# EAGLE board DemoPCB1 (EAGLE 5.11)
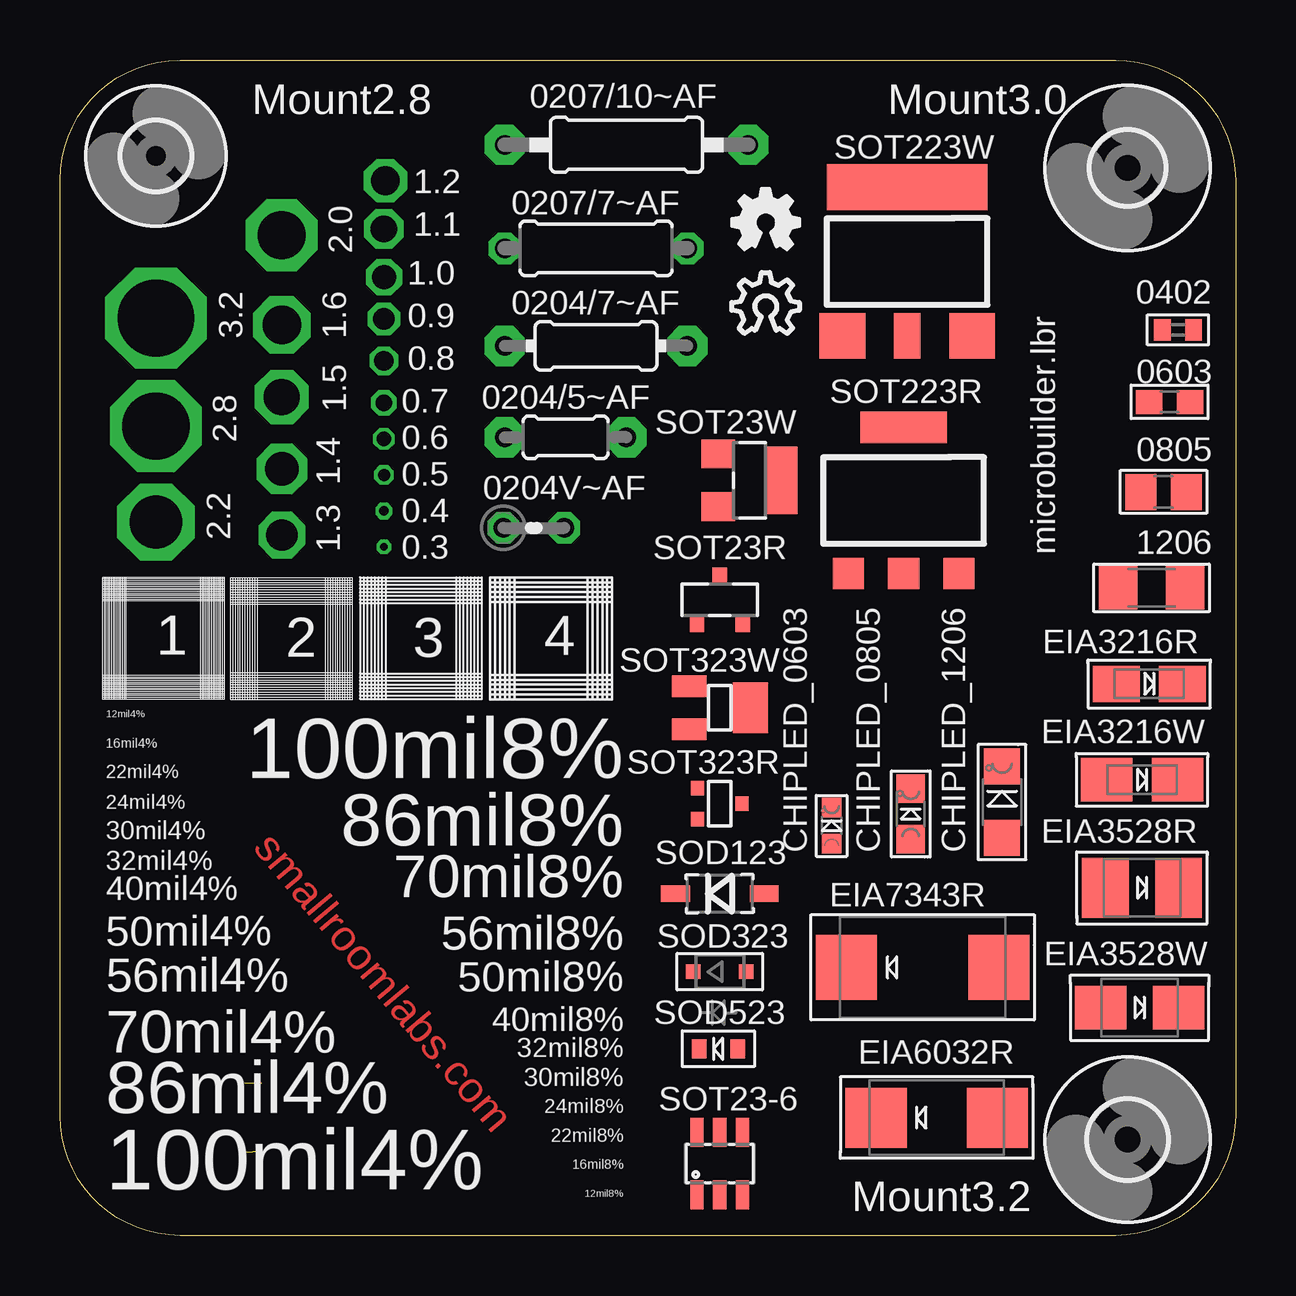
[diagram p0: board, top side]
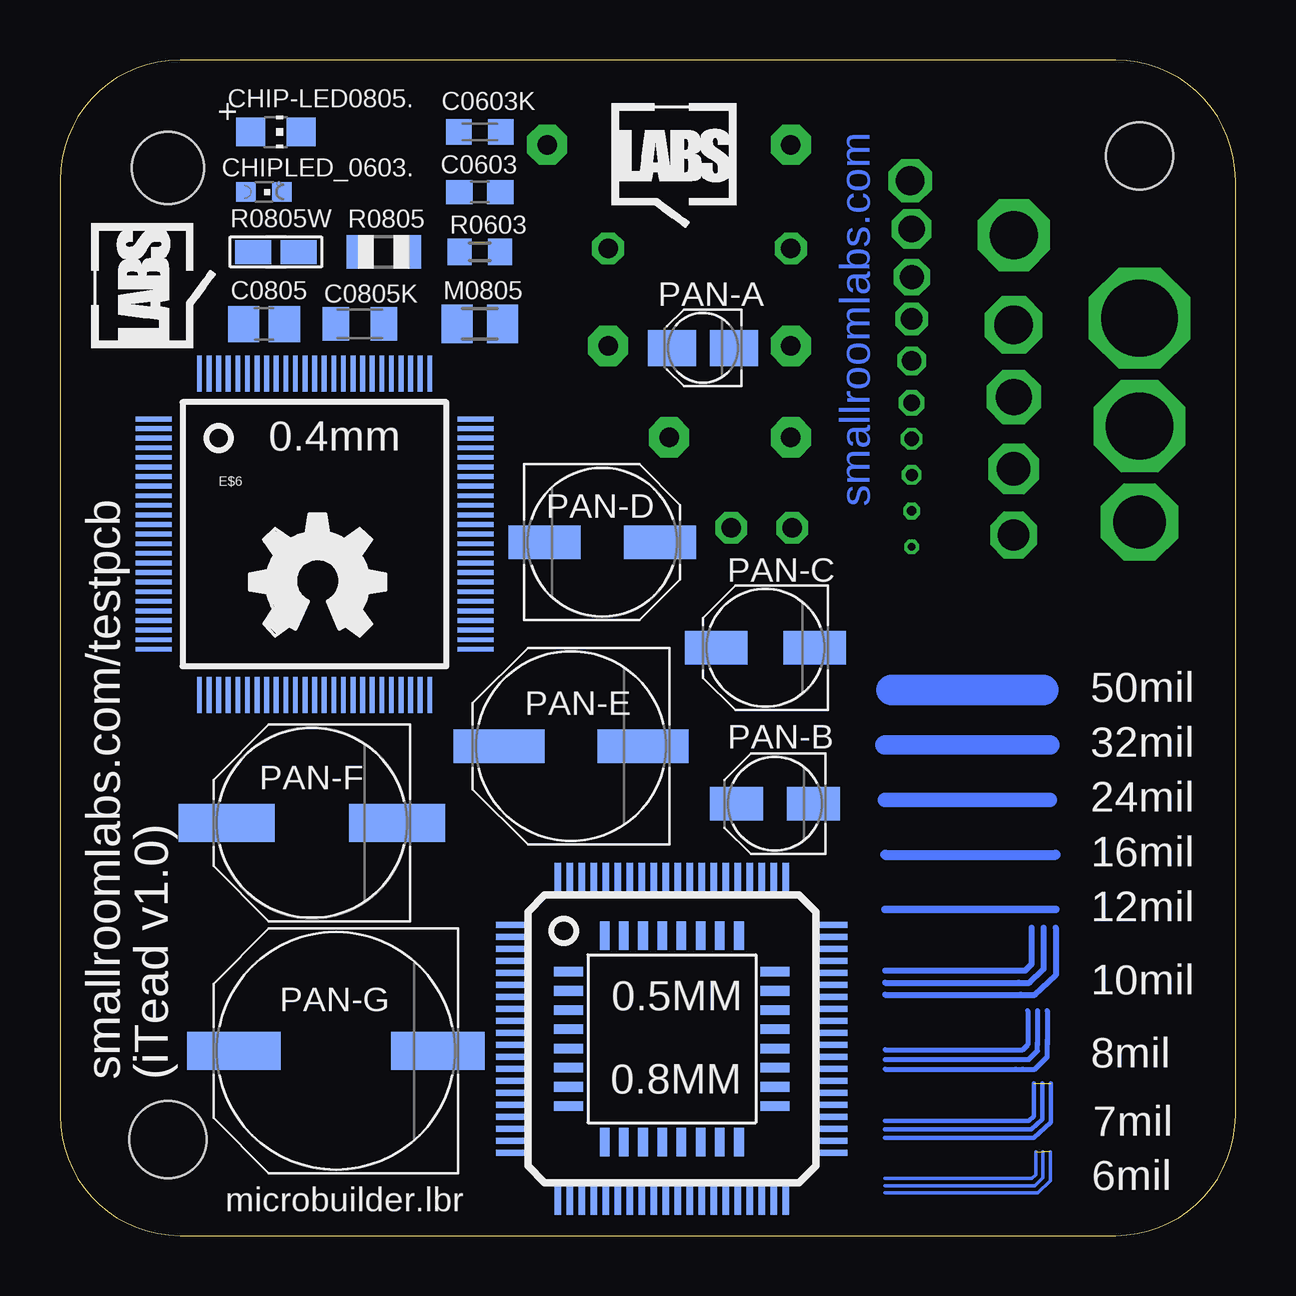
[diagram p1: board, bottom side, seen from below]

Size 49 x 49 mm. Coordinates in mm from the lower left corner, seen from the top.
Outline: 10,0 5,0 arc-90 0,5 0,31 0,44 arc-90 5,49 40,49 44,49 arc-90 49,44 49,21 49,5 arc-90 44,0 10,0
Copper layers (1*16): Top 0.035mm / dielectric 1.5mm / Bottom 0.035mm
Design rules "ITead_rule": minimum track width 6mil, minimum drill 12mil, track to track 6mil, track to pad 6mil, pad to pad 6mil, via to via 6mil, smd to smd 0mil, copper to edge 10mil, drill to drill 10mil, minimum pad ring 10mil, minimum via ring 6mil, stop-mask expansion 2mil, vias tented up to drill 100mil, thermal gap 10mil
Net classes: 1 x: width 0.152 mm, clearance 0.152 mm

## Footprints (pad centres in the part's own frame; a part is rotated, then mirrored left to right if it is on the bottom)
LQFP80 = smd 1.2 x 0.254: 1 -6.725,4.75; 2 -6.725,4.25; 3 -6.725,3.75; 4 -6.725,3.25; 5 -6.725,2.75; 6 -6.725,2.25; 7 -6.725,1.75; 8 -6.725,1.25; 9 -6.725,0.75; 10 -6.725,0.25; 11 -6.725,-0.25; 12 -6.725,-0.75; 13 -6.725,-1.25; 14 -6.725,-1.75; 15 -6.725,-2.25; 16 -6.725,-2.75; 17 -6.725,-3.25; 18 -6.725,-3.75; 19 -6.725,-4.25; 20 -6.725,-4.75; 41 6.725,-4.75; 42 6.725,-4.25; 43 6.725,-3.75; 44 6.725,-3.25; 45 6.725,-2.75; 46 6.725,-2.25; 47 6.725,-1.75; 48 6.725,-1.25; 49 6.725,-0.75; 50 6.725,-0.25; 51 6.725,0.25; 52 6.725,0.75; 53 6.725,1.25; 54 6.725,1.75; 55 6.725,2.25; 56 6.725,2.75; 57 6.725,3.25; 58 6.725,3.75; 59 6.725,4.25; 60 6.725,4.75 | smd 0.254 x 1.2: 21 -4.75,-6.725; 22 -4.25,-6.725; 23 -3.75,-6.725; 24 -3.25,-6.725; 25 -2.75,-6.725; 26 -2.25,-6.725; 27 -1.75,-6.725; 28 -1.25,-6.725; 29 -0.75,-6.725; 30 -0.25,-6.725; 31 0.25,-6.725; 32 0.75,-6.725; 33 1.25,-6.725; 34 1.75,-6.725; 35 2.25,-6.725; 36 2.75,-6.725; 37 3.25,-6.725; 38 3.75,-6.725; 39 4.25,-6.725; 40 4.75,-6.725; 61 4.75,6.725; 62 4.25,6.725; 63 3.75,6.725; 64 3.25,6.725; 65 2.75,6.725; 66 2.25,6.725; 67 1.75,6.725; 68 1.25,6.725; 69 0.75,6.725; 70 0.25,6.725; 71 -0.25,6.725; 72 -0.75,6.725; 73 -1.25,6.725; 74 -1.75,6.725; 75 -2.25,6.725; 76 -2.75,6.725; 77 -3.25,6.725; 78 -3.75,6.725; 79 -4.25,6.725; 80 -4.75,6.725
LQFP32 = smd 0.4 x 1.2: 1 -2.8,-4.3; 2 -2,-4.3; 3 -1.2,-4.3; 4 -0.4,-4.3; 5 0.4,-4.3; 6 1.2,-4.3; 7 2,-4.3; 8 2.8,-4.3; 17 2.8,4.3; 18 2,4.3; 19 1.2,4.3; 20 0.4,4.3; 21 -0.4,4.3; 22 -1.2,4.3; 23 -2,4.3; 24 -2.8,4.3 | smd 1.2 x 0.4: 9 4.3,-2.8; 10 4.3,-2; 11 4.3,-1.2; 12 4.3,-0.4; 13 4.3,0.4; 14 4.3,1.2; 15 4.3,2; 16 4.3,2.8; 25 -4.3,2.8; 26 -4.3,2; 27 -4.3,1.2; 28 -4.3,0.4; 29 -4.3,-0.4; 30 -4.3,-1.2; 31 -4.3,-2; 32 -4.3,-2.8
0204/5 = drill 0.813 pad 1.676 octagon: 1 -2.54,0; 2 2.54,0
0204/7 = drill 0.813 pad 1.676 octagon: 1 -3.81,0; 2 3.81,0
0204V = drill 0.813 octagon: 1 -1.27,0; 2 1.27,0
0207/7 = drill 0.813 octagon: 1 -3.81,0; 2 3.81,0
0207/10 = drill 0.813 pad 1.676 octagon: 1 -5.08,0; 2 5.08,0
0402 = smd 0.7 x 0.9: 1 -0.65,0; 2 0.65,0
0603 = smd 1.1 x 1: 1 -0.85,0; 2 0.85,0
0805 = smd 1.3 x 1.5: 1 -0.95,0; 2 0.95,0
1206 = smd 1.6 x 1.8: 1 -1.4,0; 2 1.4,0
C0603 = smd 1.1 x 1: 1 -0.85,0; 2 0.85,0
C0603K = smd 1.05 x 1.08: 1 -0.875,0; 2 0.875,0
C0805 = smd 1.3 x 1.5: 1 -0.85,0; 2 0.85,0
C0805K = smd 1.1 x 1.4: 1 -1,0; 2 1,0
CHIP-LED0805 = smd 1.2 x 1.2: A 0,-1.05; C 0,1.05
CHIPLED_0603 = smd 0.8 x 0.8: A 0,-0.75; C 0,0.75
CHIPLED_0805 = smd 1.2 x 1.2: A 0,-1.05; C 0,1.05
CHIPLED_1206 = smd 1.5 x 1.5: A 0,-1.496; C 0,1.496
MOUNTINGHOLE_2.8 = hole 2.8: 0,0
MOUNTINGHOLE_3.0 = hole 3: 0,0
MOUNTINGHOLE_3.2 = hole 3.2: 0,0
TQFP-100-12X12MM = smd 1.5 x 0.2: 1 -6.7,4.8; 2 -6.7,4.4; 3 -6.7,4; 4 -6.7,3.6; 5 -6.7,3.2; 6 -6.7,2.8; 7 -6.7,2.4; 8 -6.7,2; 9 -6.7,1.6; 10 -6.7,1.2; 11 -6.7,0.8; 12 -6.7,0.4; 13 -6.7,0; 14 -6.7,-0.4; 15 -6.7,-0.8; 16 -6.7,-1.2; 17 -6.7,-1.6; 18 -6.7,-2; 19 -6.7,-2.4; 20 -6.7,-2.8; 21 -6.7,-3.2; 22 -6.7,-3.6; 23 -6.7,-4; 24 -6.7,-4.4; 25 -6.7,-4.8; 51 6.7,-4.8; 52 6.7,-4.4; 53 6.7,-4; 54 6.7,-3.6; 55 6.7,-3.2; 56 6.7,-2.8; 57 6.7,-2.4; 58 6.7,-2; 59 6.7,-1.6; 60 6.7,-1.2; 61 6.7,-0.8; 62 6.7,-0.4; 63 6.7,0; 64 6.7,0.4; 65 6.7,0.8; 66 6.7,1.2; 67 6.7,1.6; 68 6.7,2; 69 6.7,2.4; 70 6.7,2.8; 71 6.7,3.2; 72 6.7,3.6; 73 6.7,4; 74 6.7,4.4; 75 6.7,4.8 | smd 0.2 x 1.5: 26 -4.8,-6.7; 27 -4.4,-6.7; 28 -4,-6.7; 29 -3.6,-6.7; 30 -3.2,-6.7; 31 -2.8,-6.7; 32 -2.4,-6.7; 33 -2,-6.7; 34 -1.6,-6.7; 35 -1.2,-6.7; 36 -0.8,-6.7; 37 -0.4,-6.7; 38 0,-6.7; 39 0.4,-6.7; 40 0.8,-6.7; 41 1.2,-6.7; 42 1.6,-6.7; 43 2,-6.7; 44 2.4,-6.7; 45 2.8,-6.7; 46 3.2,-6.7; 47 3.6,-6.7; 48 4,-6.7; 49 4.4,-6.7; 50 4.8,-6.7; 76 4.8,6.7; 77 4.4,6.7; 78 4,6.7; 79 3.6,6.7; 80 3.2,6.7; 81 2.8,6.7; 82 2.4,6.7; 83 2,6.7; 84 1.6,6.7; 85 1.2,6.7; 86 0.8,6.7; 87 0.4,6.7; 88 0,6.7; 89 -0.4,6.7; 90 -0.8,6.7; 91 -1.2,6.7; 92 -1.6,6.7; 93 -2,6.7; 94 -2.4,6.7; 95 -2.8,6.7; 96 -3.2,6.7; 97 -3.6,6.7; 98 -4,6.7; 99 -4.4,6.7; 100 -4.8,6.7
EIA3216-18/A-R = smd 1.95 x 1.5: + 1.375,0; - -1.375,0
EIA3216-18/A-W = smd 2.15 x 1.8: + 1.475,0; - -1.475,0
EIA3528-21/B-R = smd 1.95 x 2.5: + 1.525,0; - -1.525,0
EIA3528-21/B-W = smd 2.15 x 1.8: + 1.625,0; - -1.625,0
EIA6032-28/C-R = smd 2.55 x 2.5: + 2.525,0; - -2.525,0
EIA7343-31/D-R = smd 2.55 x 2.7: + 3.175,0; - -3.175,0
M0805 = smd 1.3 x 1.6: 1 -0.95,0; 2 0.95,0
PANASONIC_A = smd 2 x 1.5: + 1.3,0; - -1.3,0
PANASONIC_B = smd 2.2 x 1.4: + 1.6,0; - -1.6,0
PANASONIC_C = smd 2.6 x 1.4: + 2.05,0; - -2.05,0
PANASONIC_D = smd 3 x 1.4: + 2.4,0; - -2.4,0
PANASONIC_E = smd 3.8 x 1.4: + 3,0; - -3,0
PANASONIC_F = smd 4 x 1.6: + 3.55,0; - -3.55,0
PANASONIC_G = smd 3.9 x 1.6: + 4.25,0; - -4.25,0
R0603 = smd 1 x 1.1: 1 -0.85,0; 2 0.85,0
R0805 = smd 1.1 x 1.4: 1 -1,0; 2 1,0
R0805W = smd 1.5 x 1: 1 -0.94,0; 2 0.94,0
SOD-123 = smd 1.2 x 0.7: A 1.85,0; C -1.85,0
SOD-323 = smd 0.6 x 0.6: A 1.1,0; C -1.1,0
SOD-523 = smd 0.8 x 0.6: A 0,-0.8; K 0,0.8
SOT23-6 = smd 0.55 x 1.2: 1 -0.95,-1.3; 2 0,-1.3; 3 0.95,-1.3; 4 0.95,1.3; 5 0,1.3; 6 -0.95,1.3
SOT23-R = smd 0.6 x 0.7: 1 -0.95,-1; 2 0.95,-1; 3 0,1
SOT23-W = smd 1.2 x 1.4: 1 -1.1,-1.3; 2 1.1,-1.3 | smd 2.8 x 1.4: 3 0,1.3
SOT223-R = smd 1.3 x 1.3: 1 -2.3,-3.05; 2 0,-3.05; 3 2.3,-3.05 | smd 3.6 x 1.3: 4 0,3.05
SOT223-W = smd 1.9 x 1.9: 1 -2.7,-3.1; 3 2.7,-3.1 | smd 1.1 x 1.9: 2 0,-3.1 | smd 6.7 x 1.9: 4 0,3.1
SOT323-R = smd 0.6 x 0.55: 1 -0.65,-0.925; 2 0.65,-0.925; 3 0,0.925
SOT323-W = smd 0.9 x 1.45: 1 -0.9,-1.275; 2 0.9,-1.275 | smd 2.1 x 1.45: 3 0,1.275

## Placement (x,y rotation side)
0.5MM  [LQFP80]  23.5,8.2 0 bottom
0.8MM  [LQFP32]  23.5,8.2 0 bottom
0204/5~AF  [0204/5]  21.07,33.27 0 top
0204/7~AF  [0204/7]  22.34,37.08 0 top
0204V~AF  [0204V]  19.75,29.5 0 top
0207/7~AF  [0207/7]  22.34,41.15 0 top
0207/10~AF  [0207/10]  23.61,45.47 0 top
0402  [0402]  46.6,37.75 180 top
0603  [0603]  46.25,34.75 180 top
0805  [0805]  46,31 180 top
1206  [1206]  45.5,27 180 top
C0603  [C0603]  31.5,43.5 0 bottom
C0603K  [C0603K]  31.5,46 0 bottom
C0805  [C0805]  40.5,38 0 bottom
C0805K  [C0805K]  36.5,38 0 bottom
CHIP-LED0805.  [CHIP-LED0805]  40,46 270 bottom
CHIPLED_0603  [CHIPLED_0603]  32.16,17.08 0 top
CHIPLED_0603.  [CHIPLED_0603]  40.5,43.5 270 bottom
CHIPLED_0805  [CHIPLED_0805]  35.46,17.57 0 top
CHIPLED_1206  [CHIPLED_1206]  39.27,18.07 0 top
E$1  [MOUNTINGHOLE_2.8]  4,45 0 top
E$2  [MOUNTINGHOLE_3.0]  44.5,44.5 0 top
E$3  [MOUNTINGHOLE_3.2]  44.5,4 0 top
E$4  [SRL-LOGO-TPLACE-5MM]  42.5,37 90 bottom
E$5  [SRL-LOGO-TPLACE-5MM]  26,42 0 bottom
E$6  [TQFP-100-12X12MM]  38.39,29.24 0 bottom
E$7  [OSHW_8X100_NOTEXT]  28,37.6 0 top
E$8  [OSHW_FILLX200_NOTEXT]  41.1,25 0 bottom
E$11  [OSHW_FILLX100_NOTEXT]  28,41.1 0 top
EIA3216R  [EIA3216-18/A-R]  45.4,23 0 top
EIA3216W  [EIA3216-18/A-W]  45.1,19 0 top
EIA3528R  [EIA3528-21/B-R]  45.1,14.5 0 top
EIA3528W  [EIA3528-21/B-W]  45,9.5 0 top
EIA6032R  [EIA6032-28/C-R]  36.54,4.91 180 top
EIA7343R  [EIA7343-31/D-R]  35.96,11.18 180 top
M0805  [M0805]  31.5,38 0 bottom
PAN-A  [PANASONIC_A]  22.2,37 180 bottom
PAN-B  [PANASONIC_B]  19.2,18 180 bottom
PAN-C  [PANASONIC_C]  19.6,24.5 180 bottom
PAN-D  [PANASONIC_D]  26.4,28.9 0 bottom
PAN-E  [PANASONIC_E]  27.7,20.4 180 bottom
PAN-F  [PANASONIC_F]  38.5,17.2 180 bottom
PAN-G  [PANASONIC_G]  37.5,7.7 180 bottom
R0603  [R0603]  31.5,41 0 bottom
R0805  [R0805]  35.5,41 0 bottom
R0805W  [R0805W]  40,41 0 bottom
SOD123  [SOD-123]  27.5,14.25 0 top
SOD323  [SOD-323]  27.5,11 0 top
SOD523  [SOD-523]  27.44,7.79 90 top
SOT23-6  [SOT23-6]  27.5,3 0 top
SOT23R  [SOT23-R]  27.5,26.5 0 top
SOT23W  [SOT23-W]  28.74,31.48 270 top
SOT223R  [SOT223-R]  35.17,30.64 0 top
SOT223W  [SOT223-W]  35.32,40.6 0 top
SOT323R  [SOT323-R]  27.5,18 270 top
SOT323W  [SOT323-W]  27.5,22 270 top

## Library data of the parts
0.5MM 0402 0603 0805 1206 CHIPLED_0603 CHIPLED_0805 CHIPLED_1206 E$1-E$3 EIA3216R EIA3216W EIA3528R EIA3528W EIA6032R EIA7343R SOD123 SOD323 SOD523 SOT23-6 SOT23R SOT23W SOT223R SOT223W SOT323R SOT323W = microbuilder
0.8MM E$6 = SparkFun
0204/5~AF 0204/7~AF 0204V~AF 0207/7~AF 0207/10~AF C0603 C0603K C0805 C0805K CHIP-LED0805. CHIPLED_0603. M0805 PAN-A PAN-B PAN-C PAN-D PAN-E PAN-F PAN-G R0603 R0805 R0805W = adafruit
E$4 E$5 = SmallRoomLabs
E$7 E$8 E$11 = OSHW

## Tracks (layer width: path | path; a pad name or v marks a point on that pad's centre or on a via)
S$1  (2 unrouted)
  Bottom 0.152: 14.61,2.08 8.36,2.08 8.03,2.41 8.03,3.48 | 14.61,2.39 8.48,2.39 8.33,2.54 8.33,3.48 | 14.61,1.78 8.23,1.78 7.72,2.29 7.72,3.48
S$2  (2 unrouted)
  Bottom 0.178: 14.61,4.06 8.61,4.06 | 8.61,4.06 8.41,4.06 | 14.61,4.42 8.51,4.42 8.05,4.85 8.05,6.35 | 14.61,4.78 8.89,4.78 8.61,4.78 8.41,4.98 8.41,6.35 | 7.7,6.35 7.7,4.72 8.41,4.06 | 8.61,4.06 8.41,4.06
S$3
  Bottom 0.203: 14.61,6.93 9.17,6.93 | 9.17,6.93 8.87,6.93 | 14.61,7.34 9.07,7.34 | 9.07,7.34 8.87,7.34 | 14.61,7.75 8.87,7.75 8.66,7.95 8.66,9.37 | 8.26,9.37 8.26,8.05 | 8.26,8.05 8.26,7.95 | 7.85,9.37 7.85,8.15 | 7.85,8.15 7.85,7.95 | 9.07,7.34 8.61,7.34 8.26,7.7 8.26,8.05 | 9.17,6.93 8.36,6.93 7.85,7.44 7.85,8.15
S$4
  Bottom 0.254: 14.61,10.03 8.97,10.03 | 8.97,10.03 8.36,10.03 | 14.61,10.54 9.04,10.54 | 9.04,10.54 8.59,10.54 | 14.61,11.05 8.97,11.05 | 8.97,11.05 8.76,11.05 | 8.51,12.83 8.51,11.3 8.76,11.05 | 8,12.83 8,11.1 8.59,10.54 | 7.49,12.83 7.49,10.85 8.36,10.03 | 8.97,11.05 8.76,11.05 | 9.04,10.54 8.59,10.54 | 8.97,10.03 8.36,10.03
S$5
  Bottom 0.305: 14.61,13.59 7.49,13.59
S$6
  Bottom 0.406: 14.61,15.88 7.49,15.88
S$7
  Bottom 0.61: 14.61,18.16 7.75,18.16
S$8
  Bottom 0.813: 14.61,20.45 7.75,20.45
S$9
  Bottom 1.27: 14.35,22.73 8,22.73
S$10  (via drill 3.2)
  other vias: 4,38.24
S$11  (via drill 2.8)
  other vias: 4,33.74
S$12  (via drill 2.2)
  other vias: 4,29.74
S$13  (via drill 2)
  other vias: 9.25,41.71
S$14  (via drill 1.6)
  other vias: 9.25,37.95
S$15  (via drill 1.5)
  other vias: 9.25,34.95
S$16  (via drill 1.4)
  other vias: 9.25,31.95
S$17  (via drill 1.3)
  other vias: 9.25,29.2
S$18  (via drill 1.2)
  other vias: 13.56,43.97
S$19  (via drill 1.1)
  other vias: 13.5,41.95
S$20  (via drill 1)
  other vias: 13.5,39.95
S$21  (via drill 0.9)
  other vias: 13.5,38.21
S$22  (via drill 0.8)
  other vias: 13.5,36.46
S$23  (via drill 0.7)
  other vias: 13.5,34.71
S$24  (via drill 0.6)
  other vias: 13.5,33.21
S$25  (via drill 0.5)
  other vias: 13.5,31.71
S$26  (via drill 0.4)
  other vias: 13.5,30.21
S$27  (via drill 0.3)
  other vias: 13.5,28.71

## Text on the board
Top: smallroomlabs.com
Bottom: smallroomlabs.com
tPlace: Mount2.8 | Mount3.0 | 2.0 | 1.2 | 1.1 | 1.0 | 3.2 | 1.6 | 0.9 | 1.5 | 0.8 | 2.8 | 0.7 | 1.4 | 0.6 | 2.2 | 0.5 | 1.3 | 0.4 | 0.3 | microbuilder.lbr | 1 | 2 | 3 | 4 | 12mil4% | 100mil8% | 16mil4% | 22mil4% | 24mil4% | 86mil8% | 30mil4% | 70mil8% | 32mil4% | 40mil4% | 56mil8% | 50mil4% | 50mil8% | 56mil4% | 40mil8% | 70mil4% | 32mil8% | 30mil8% | 24mil8% | 86mil4% | 22mil8% | 16mil8% | 100mil4% | 12mil8% | Mount3.2
bPlace: 0.4mm | 50mil | 32mil | 24mil | 16mil | 12mil | 10mil | 8mil | (iTead v1.0) | smallroomlabs.com/testpcb | 7mil | 6mil | microbuilder.lbr